# Altium PCB lcd_board_1.PcbDoc
Units mil, origin at the board's own origin, x right, y up, seen from the top; angles counter-clockwise.
Board outline 6000 x 4000 mil, 2 copper layers (Top Layer, Bottom Layer); 100 components, 86 nets, 397 pads, 6 vias.
Unrouted connection lines stored in the file: 231.
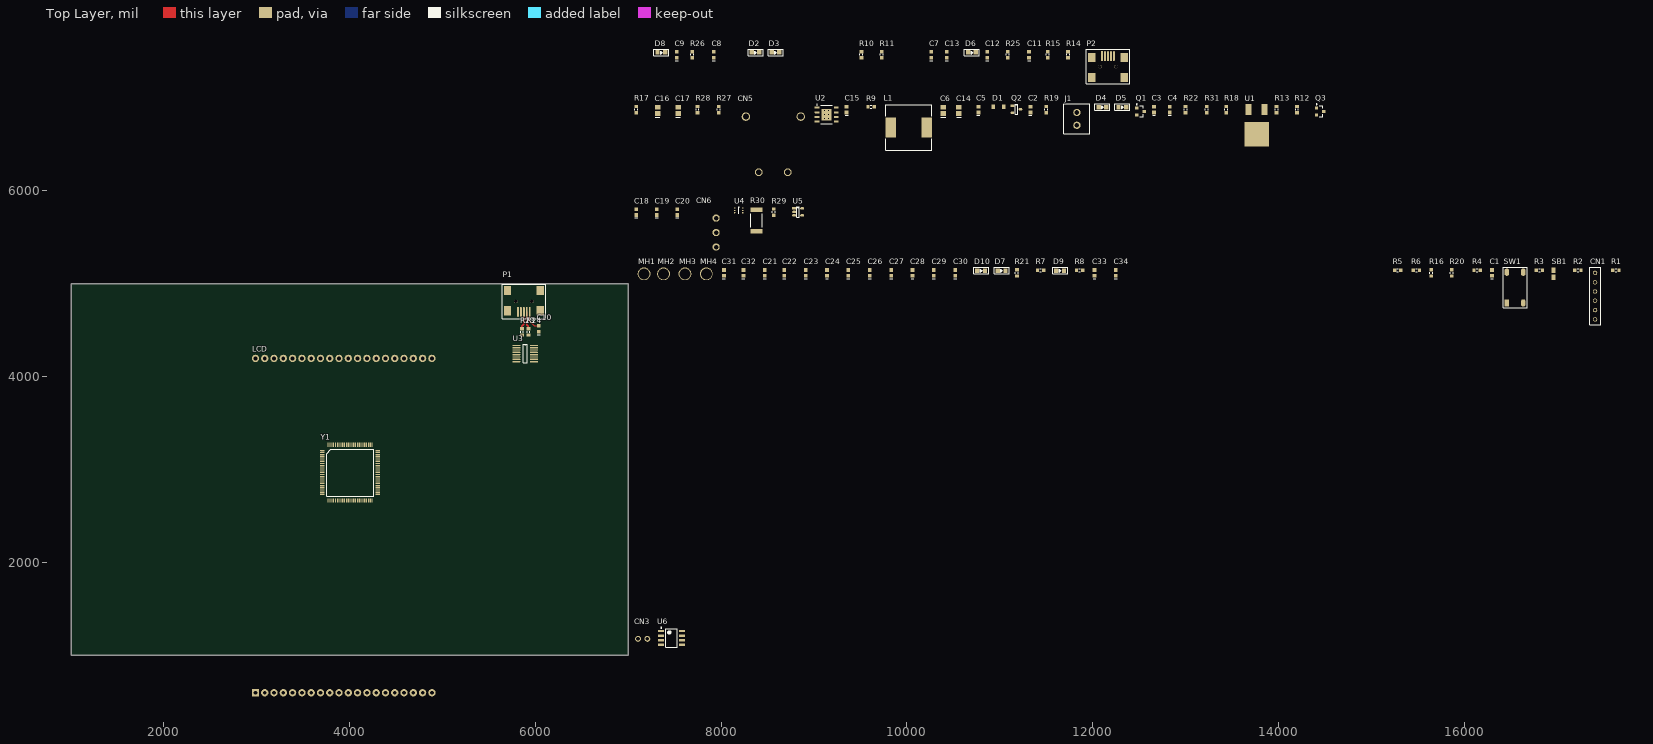
[diagram p0: Top Layer view]
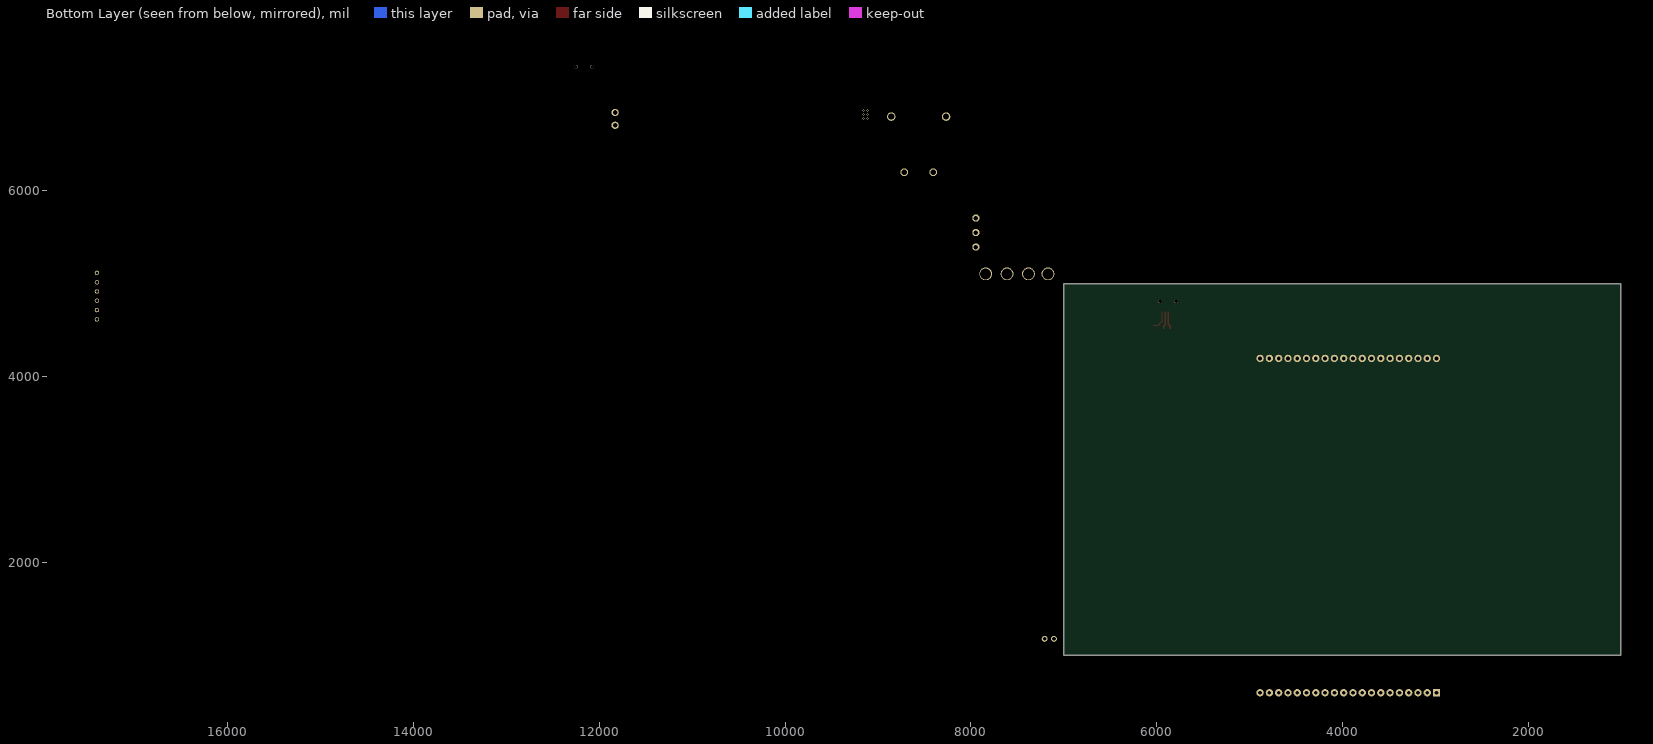
[diagram p1: Bottom Layer view, seen from below]

## Layer stack, top to bottom
Top Solder: solder mask 0.4, Solder Resist, Dk 3.5
Top Layer: signal copper 1.4
Dielectric 1: dielectric 12.6, FR-4, Dk 4.8
Bottom Layer: signal copper 1.4
Bottom Solder: solder mask 0.4, Solder Resist, Dk 3.5

## Board outline
1000,1000 7000,1000 7000,5000 1000,5000

## Design rules (kind name [scope] priority, off if disabled: settings)
Clearance [All] p1: gap=10 ignorepadtopadclearanceinfootprint=FALSE except(0: Arc-Hole Track-Hole SMDPad-Hole THPad-Hole Via-Hole Fill-Hole Poly-Hole Region-Hole Text-Hole)
DiffPairsRouting [All] p1: maxlimit=10 minlimit=10 mostfreqgap=10 toplayer_minwidth=15 toplayer_maxwidth=15 toplayer_prefwidth=15 bottomlayer_minwidth=15 bottomlayer_maxwidth=15 bottomlayer_prefwidth=15 maxuncoupledlength=500
PolygonConnect [All] p1: connectstyle=Relief reliefconductorwidth=10 reliefentries=4 polygonreliefangle="90 Angle" airgapwidth=10
RoomDefinition USB [InComponentClass('USB')] p1: confinementstyle=ConfineIn formatcopy=TRUE lockcomponents=FALSE outline 0,0 2000,0 2000,1000 0,1000
RoomDefinition LCD_board [InComponentClass('LCD_board')] p2: confinementstyle=ConfineIn formatcopy=TRUE lockcomponents=FALSE outline 7045,1060 9045,1060 9045,4860 7045,4860
RoomDefinition power [InComponentClass('power')] p3: confinementstyle=ConfineIn formatcopy=TRUE lockcomponents=FALSE outline 7045,5985 14520,5985 14520,7045 7045,7045
RoomDefinition "LED strip" [InComponentClass('LED strip')] p4: confinementstyle=ConfineIn formatcopy=TRUE lockcomponents=FALSE outline 7045,5315 8905,5315 8905,5940 7045,5940
RoomDefinition CAN [InComponentClass('CAN')] p5: confinementstyle=ConfineIn formatcopy=TRUE lockcomponents=FALSE outline 7045,1060 7635,1060 7635,1410 7045,1410
RoutingVias [All] p1: holewidth=28 width=50 viastyle="Through Hole" minholewidth=28 minwidth=50 maxholewidth=28 maxwidth=50
SolderMaskExpansion [All] p1: expansion=4
Width [All] p1: maxlimit=10 minlimit=10 preferedwidth=10
29 further rules are at their usual default settings.

## Classes and differential pairs
component class USB: C7 C8 C9 C10 C11 C12 C13 D2 D3 D6 D8 P1 P2 R10 R11 R14 R15 R23 R24 R25 R26 U3
component class power: C2 C3 C4 C5 C6 C14 C15 C16 C17 CN5 D1 D4 D5 J1 L1 Q1 Q2 Q3 R9 R12 R13 R17 R18 R19 R22 R27 R28 R31 U1 U2
component class "LED strip": C18 C19 C20 CN6 R29 R30 U4 U5
component class LCD_board: C1 C21 C22 C23 C24 C25 C26 C27 C28 C29 C30 C31 C32 C33 C34 CN1 CN2 D7 D9 D10 LCD LCD1 MH1 MH2 MH3 MH4 R1 R2 R3 R4 R5 R6 R7 R8 R16 R20 R21 SB1 SW1 Y1
component class CAN: CN3 U6
differential pair USB_Data: +USB_Data_P -USB_Data_N
differential pair USB_Data_UART: +USB_Data_UART_P -USB_Data_UART_N
differential pair Con_USB_Data: +Con_USB_Data_P -Con_USB_Data_N
differential pair Con_USB_Data_UART: +Con_USB_Data_UART_P -Con_USB_Data_UART_N

## Components (designator, comment, footprint, x,y, rotation, side; value= is the part's Value field where it differs from the comment)
C1 "0.1μF" "CAPC1608N(0603\")" 16299.57,5115.43 r90 top value=0.1µF
C2 "0.1μF" "CAPC1608N(0603\")" 11330,6875 r90 top value=0.1µF
C3 "0.1μF" "CAPC1608N(0603\")" 12660,6875 r90 top value=0.1µF
C4 "0.1μF" "CAPC1608N(0603\")" 12830,6875 r90 top value=0.1µF
C5 "10nF" "CAPC1608N(0603\")" 10770,6875 r90 top
C6 "22µF" "CAPC2012N(0805\")" 10390,6865 r90 top
C7 "0.1μF" "CAPC1608N(0603\")" 10260,7465 r90 top value=0.1µF
C8 "0.1μF" "CAPC1608N(0603\")" 7920,7465 r90 top value=0.1µF
C9 "0.1μF" "CAPC1608N(0603\")" 7520,7465 r90 top value=0.1µF
C10 "1μF" "CAPC1608N(0603\")" 6035,4513.46 r90 top value=1µF
C11 "0.1μF" "CAPC1608N(0603\")" 11315,7465 r90 top value=0.1µF
C12 "0.1μF" "CAPC1608N(0603\")" 10865,7465 r90 top value=0.1µF
C13 "1μF" "CAPC1608N(0603\")" 10430,7465 r90 top value=1µF
C14 "22µF" "CAPC2012N(0805\")" 10560,6865 r90 top
C15 "82pF" "CAPC1608N(0603\")" 9350,6875 r90 top
C16 "4.7µF" "CAPC2012N(0805\")" 7315,6865 r90 top
C17 "4.7µF" "CAPC2012N(0805\")" 7535,6865 r90 top
C18 "0.1μF" "CAPC1608N(0603\")" 7085,5770 r90 top value=0.1µF
C19 "0.1μF" "CAPC1608N(0603\")" 7305,5770 r90 top value=0.1µF
C20 "0.1μF" "CAPC1608N(0603\")" 7525,5770 r90 top value=0.1µF
C21 "0.1μF" "CAPC1608N(0603\")" 8469.57,5115.43 r90 top value=0.1µF
C22 "0.1μF" "CAPC1608N(0603\")" 8679.57,5115.43 r90 top value=0.1µF
C23 "0.1μF" "CAPC1608N(0603\")" 8909.57,5115.43 r90 top value=0.1µF
C24 "0.1μF" "CAPC1608N(0603\")" 9139.57,5115.43 r90 top value=0.1µF
C25 "0.1μF" "CAPC1608N(0603\")" 9369.57,5115.43 r90 top value=0.1µF
C26 "0.1μF" "CAPC1608N(0603\")" 9599.57,5115.43 r90 top value=0.1µF
C27 "0.1μF" "CAPC1608N(0603\")" 9829.57,5115.43 r90 top value=0.1µF
C28 "1μF" "CAPC1608N(0603\")" 10059.57,5115.43 r90 top value=1µF
C29 "1μF" "CAPC1608N(0603\")" 10289.57,5115.43 r90 top value=1µF
C30 "1μF" "CAPC1608N(0603\")" 10519.57,5115.43 r90 top value=1µF
C31 "2.2µF" "CAPC1608N(0603\")" 8029.57,5115.43 r90 top
C32 "2.2µF" "CAPC1608N(0603\")" 8239.57,5115.43 r90 top
C33 "0.1μF" "CAPC1608N(0603\")" 12019.57,5115.43 r90 top value=0.1µF
C34 "1μF" "CAPC1608N(0603\")" 12249.57,5115.43 r90 top value=1µF
CN1 "Header Male 1x6" "Header, Male, 1X6" 17409.57,4615.43 r90 top
CN3 "640456-2" 640456-2 7155,1190 r0 top
CN5 "Power" "2X1 Power Connector 90 degrees" 8405,6200 r0 top
CN6 "B3PS-VH(LF)(SN)" "3X1 Male Header, Locking, 10A" 7945,5550 r90 top
D1 "DSS14UTR" SOD-123F 10985,6905 r0 top
D2 "Red" LED0805 8370,7490 r0 top
D3 "Red" LED0805 8585,7490 r0 top
D4 "Red" LED0805 12105,6900 r0 top
D5 "Green" LED0805 12320,6900 r0 top
D6 "Blue" LED0805 10700,7490 r0 top
D7 "Orange" LED0805 11019.57,5140.43 r0 top
D8 "Green" LED0805 7355,7490 r0 top
D9 "Blue" LED0805 11649.57,5140.43 r0 top
D10 "Green" LED0805 10799.57,5140.43 r0 top
J1 "2x1 Term Block" "2X1 Terminal Blocks" 11830,6705 r90 top
L1 "15µH" WE-PD-XL 10020,6680 r0 top
LCD "3.5 Inch TFT Touchscreen LCD" LCD_touchscreen_tft 2985,595 r90 top
MH1 "3mm" Mount-Hole_3mm 7169.57,5105.43 r0 top
MH2 "3mm" Mount-Hole_3mm 7379.57,5105.43 r0 top
MH3 "3mm" Mount-Hole_3mm 7609.57,5105.43 r0 top
MH4 "3mm" Mount-Hole_3mm 7839.57,5105.43 r0 top
P1 "Mini B USB Port" "Mini B USB Footprint" 5875,4810 r180 top
P2 "Mini B USB Port" "Mini B USB Footprint" 12165,7335 r0 top
Q1 "DMP3098L-7" DIOD-SOT23-3_V 12515,6855 r0 top
Q2 "MOSFET N-Channel, 30V, 6.2A," SOT-23 11140,6915 r0 top
Q3 "DMP3098L-7" DIOD-SOT23-3_V 14450,6855 r0 top
R1 "100k" "RESC1608N(0603\")" 17634.57,5145.43 r0 top
R2 "10k" "RESC1608N(0603\")" 17224.57,5145.43 r0 top
R3 "10k" "RESC1608N(0603\")" 16809.57,5145.43 r0 top
R4 "10k" "RESC1608N(0603\")" 16139.57,5145.43 r0 top
R5 "10k" "RESC1608N(0603\")" 15284.57,5145.43 r0 top
R6 "10k" "RESC1608N(0603\")" 15484.57,5145.43 r0 top
R7 "715R" "RESC1608N(0603\")" 11439.57,5145.43 r0 top
R8 "715R" "RESC1608N(0603\")" 11859.57,5145.43 r0 top
R9 "100k" "RESC1608N(0603\")" 9615,6905 r0 top
R10 "100" "RESC1608N(0603\")" 9510,7465 r90 top
R11 "100" "RESC1608N(0603\")" 9730,7465 r90 top
R12 "10k" "RESC1608N(0603\")" 14200,6875 r90 top
R13 "10k" "RESC1608N(0603\")" 13980,6875 r90 top
R14 "22" "RESC1608N(0603\")" 11735,7465 r90 top
R15 "22" "RESC1608N(0603\")" 11515,7465 r90 top
R16 "10k" "RESC1608N(0603\")" 15644.57,5115.43 r90 top
R17 "31.6kR" "RESC1608N(0603\")" 7085,6875 r90 top
R18 "100k" "RESC1608N(0603\")" 13440,6875 r90 top
R19 "10k" "RESC1608N(0603\")" 11500,6875 r90 top
R20 "10k" "RESC1608N(0603\")" 15864.57,5115.43 r90 top
R21 "715R" "RESC1608N(0603\")" 11184.57,5115.43 r90 top
R22 "715R" "RESC1608N(0603\")" 13000,6875 r90 top
R23 "22" "RESC1608N(0603\")" 5855,4480 r270 top
R24 "22" "RESC1608N(0603\")" 5925,4480 r270 top
R25 "100" "RESC1608N(0603\")" 11085,7465 r90 top
R26 "150R" "RESC1608N(0603\")" 7690,7465 r90 top
R27 "10k" "RESC1608N(0603\")" 7975,6875 r90 top
R28 "100k" "RESC1608N(0603\")" 7745,6875 r90 top
R29 "10k" "RESC1608N(0603\")" 8565,5770 r90 top
R30 "0.02" "RESC6332N(2512\")" 8380,5680 r90 top
R31 "715R" "RESC1608N(0603\")" 13230,6875 r90 top
SB1 "Solder Bridge" "Solder Bridge" 16959.57,5145.43 r0 top
SW1 "SPST" 4-SPST-NO 16459.57,4800.43 r90 top
U1 "3.3V Lin Reg 30Vin" T0-252 13765,6610 r90 top
U2 "36V 5A Buck DC-DC RT8279GSP" 8-SOP-EP 9135,6820 r0 top
U3 "FT230X" SSOP16 5795,4335 r0 top
U4 "Level Shifter" SOT-363 8145,5815 r0 top
U5 "ZXCT1110W5-7, Current Sensor, High-Side, Analog" SOT23-5 8785,5810 r0 top
U6 "SN65HVD232DR" 8-SOIC 7465,1185 r0 top
Y1 "STM32F413VGT6" STM-LQFP100_M 3705,3200.91 r0 top

## Footprints (in the part's own frame and the unit in brackets; to place one, negate y for a bottom-side part, rotate by r counter-clockwise, add the part's x,y. Pads: shape width x height; smd on the part's side, far side on the other; paste and mask are expansions set on the pad)
"2X1 Power Connector 90 degrees" [mm]
  round 2.1 hole 1.5: 1(0,0) 2(7.92,0)
  round 2.3 hole 1.7: 3(-3.54,15.2) 4(11.46,15.2)
  body extent -5.96,-5.32 13.84,18.68, height 13.56
"2X1 Terminal Blocks" [mm] "ED2740-ND"
  round 2 hole 1.24: 1(0,0) 2(3.5,0)
  silkscreen extent -2.29,-3.56 5.84,3.56, body extent -2.22,-3.44 5.78,3.56, height 8.4
"3X1 Male Header, Locking, 10A" [mm]
  round 2 hole 1.25: 1(-3.96,0) 2(0,0) 3(3.96,0)
  Top Layer pour cut-out: 7.239,-3.429
4-SPST-NO [mm]
  rect 2x1.3 smd: 1(-0.2,0)
  oval 2x1.3 smd: 2(8.2,0) 3(-0.2,-4.5) 4(8.2,-4.5)
  silkscreen extent -1.52,-5.59 9.53,1.02, body extent -0.56,-5.29 8.44,0.71, height 5
8-SOIC [mm] "SOIC, 8-Leads, Body 5x4mm, Pitch 1.27mm, IPC Low Density"
  rrect15% 1.65x0.65 smd: 1(-2.825,1.905) 2(-2.825,0.635) 3(-2.825,-0.635) 4(-2.825,-1.905) 5(2.825,-1.905) 6(2.825,-0.635) 7(2.825,0.635) 8(2.825,1.905)
  silkscreen extent -2.95,-2.5 1.6,2.9, body extent -3,-2.45 3,2.45, height 1.63
8-SOP-EP [mm]
  rrect18% 1.25x0.55 smd: 1(-2.625,1.905) 2(-2.625,0.635) 3(-2.625,-0.635) 4(-2.625,-1.905) 5(2.625,-1.905) 6(2.625,-0.635) 7(2.625,0.635) 8(2.625,1.905)
  rrect4% 2.69x3.2 smd: 9(0,0)
  silkscreen extent -2.75,-2.5 1.6,2.85, body extent -2.98,-2.45 2.98,2.45, height 1.52
640456-2 [mm]
  round 1.6 hole 1: 1(-1.27,-0.381) 2(1.27,-0.381)
  body extent -2.54,-3.05 2.54,2.79, height 10.09
"CAPC1608N(0603\")" [mm] "Chip Capacitor, Body 1.6x0.8mm (0603\"), IPC Medium Density"
  rect 1x1 smd: 1(-0.8,0) 2(0.8,0)
  silkscreen extent -1.6,-0.4 -1.6,0.4, body extent -0.8,-0.4 0.8,0.4, height 0.9
"CAPC2012N(0805\")" [mm] "Chip Capacitor, Body 2.0x1.3mm (0805\"), IPC Medium Density"
  rect 1.3x1.5 smd: 1(-0.85,0) 2(0.85,0)
  silkscreen extent -1.8,-0.65 -1.8,0.65, body extent -1,-0.62 1,0.63, height 1
DIOD-SOT23-3_V [mm] "SOT23, 3-Leads, Body 3x1.4mm, Pitch 0.95mm"
  rect 0.9x0.8 smd: 1(-1,0.95) 2(-1,-0.95) 3(1,0)
  silkscreen extent -1.12,-1.5 0.7,2.02, body extent -1.25,-1.5 1.25,1.5, height 1.1
"Header, Male, 1X6" [mm]
  round 1.2 hole 0.9: 1(0,0) 2(2.54,0) 3(5.08,0) 4(7.62,0) 5(10.16,0) 6(12.7,0)
  silkscreen extent -1.5,-1.5 14.2,1.5, body extent -1.27,-1.24 14,1.25, height 8.54
LCD_touchscreen_tft [mm]
  rect 2x2 hole 1.02: 1(0,0)
  round 2 hole 1.02: 2(0,-2.54) 3(0,-5.08) 4(0,-7.62) 5(0,-10.16) 6(0,-12.7) 7(0,-15.24) 8(0,-17.78) 9(0,-20.32) 10(0,-22.86) 11(0,-25.4) 12(0,-27.94) 13(0,-30.48) 14(0,-33.02) 15(0,-35.56) 16(0,-38.1) 17(0,-40.64) 18(0,-43.18) 19(0,-45.72) 20(0,-48.26) 21(91.44,-48.26) 22(91.44,-45.72) 23(91.44,-43.18) 24(91.44,-40.64) 25(91.44,-38.1) 26(91.44,-35.56) 27(91.44,-33.02) 28(91.44,-30.48) 29(91.44,-27.94) 30(91.44,-25.4) 31(91.44,-22.86) 32(91.44,-20.32) 33(91.44,-17.78) 34(91.44,-15.24) 35(91.44,-12.7) 36(91.44,-10.16) 37(91.44,-7.62) 38(91.44,-5.08) 39(91.44,-2.54) 40(91.44,0)
LED0805 [mm]
  rect 1.2x1.2 smd: 1(1.05,0) 2(-1.05,0)
  silkscreen extent -2.05,-0.9 2.05,0.9
"Mini B USB Footprint" [mm]
  rect 0.5x2.75 smd: 1(-1.6,2.913)
  oval 0.5x2.75 smd: 2(-0.8,2.913) 3(0,2.913) 4(0.8,2.913) 5(1.6,2.913)
  rect 2x2.5 smd: ""(-4.45,-2.912) ""(-4.45,2.588) ""(4.45,-2.912) ""(4.45,2.588)
  round 0.9 hole 0.95 unplated: ""(-2.2,0.038) ""(2.2,0.038)
  silkscreen extent -5.95,-4.64 5.92,4.74, body extent -4.95,-5.87 4.95,3.37, height 3.93
Mount-Hole_3mm [mm]
  round 3.5 hole 3: 1(0,0)
"RESC1608N(0603\")" [mm] "Chip Resistor, Body 1.6x0.8mm (0603\"), IPC Medium Density"
  rect 0.9x1 smd: 1(-0.85,0) 2(0.85,0)
  silkscreen extent -0.2,-0.4 0.2,0.4, body extent -0.77,-0.42 0.78,0.43, height 0.44
"RESC6332N(2512\")" [mm] "Chip Resistor, Body 6.3x3.2mm (2512\"), IPC Medium Density"
  rect 1.3x3.4 smd: 1(-2.95,0) 2(2.95,0)
  silkscreen extent -1.9,-1.6 1.9,1.6, body extent -3.2,-1.6 3.2,1.6, height 0.6
SOD-123F [mm]
  rect 0.95x1.2 smd: A(-1.425,0) K(1.425,0)
  body extent -1.87,-0.85 1.88,0.85, height 1.2
"Solder Bridge" [mm]
  rect 1.1x1.524 smd: 1(0,0) 2(0,-2)
SOT23-5 [mm]
  rect 1.06x0.65 smd: 1(0,0)
  oval 1.06x0.65 smd: 2(0,-0.95) 3(0,-1.9) 4(2.2,-1.9) 5(2.2,0)
  silkscreen extent 0.76,-2.38 1.45,0.48, body extent -0.18,-2.44 2.32,0.56, height 1.05
SOT-23 [mm]
  rect 1x0.7 smd: 1(-0.1,0)
  oval 1x0.7 smd: 2(-0.1,-1.9) 3(2.1,-0.95)
  silkscreen extent 0.7,-2.38 1.3,0.48, body extent -0.25,-2.4 2.25,0.6, height 1.06
SOT-363 [mm]
  rect 0.45x0.3 smd: 1(0,0)
  oval 0.45x0.3 smd: 2(0,-0.65) 3(0,-1.3) 4(2.2,-1.3) 5(2.2,-0.65) 6(2.2,0)
  silkscreen extent 0.94,-1.63 1.26,0.33, body extent -0.07,-1.7 2.23,0.4, height 1
SSOP16 [mm]
  rect 2.2x0.345 smd: 1(0,0)
  oval 2.2x0.345 smd: 2(0,-0.635) 3(0,-1.27) 4(0,-1.905) 5(0,-2.54) 6(0,-3.175) 7(0,-3.81) 8(0,-4.445) 9(4.8,-4.445) 10(4.8,-3.81) 11(4.8,-3.175) 12(4.8,-2.54) 13(4.8,-1.905) 14(4.8,-1.27) 15(4.8,-0.635) 16(4.8,0)
  silkscreen extent 1.84,-4.76 2.97,0.32
STM-LQFP100_M [mm]
  oval 1.2x0.3 smd: 1(0,0)
  rect 1.2x0.3 smd: 2(0,-0.5) 3(0,-1) 4(0,-1.5) 5(0,-2) 6(0,-2.5) 7(0,-3) 8(0,-3.5) 9(0,-4) 10(0,-4.5) 11(0,-5) 12(0,-5.5) 13(0,-6) 14(0,-6.5) 15(0,-7) 16(0,-7.5) 17(0,-8) 18(0,-8.5) 19(0,-9) 20(0,-9.5) 21(0,-10) 22(0,-10.5) 23(0,-11) 24(0,-11.5) 25(0,-12) 51(15.2,-12) 52(15.2,-11.5) 53(15.2,-11) 54(15.2,-10.5) 55(15.2,-10) 56(15.2,-9.5) 57(15.2,-9) 58(15.2,-8.5) 59(15.2,-8) 60(15.2,-7.5) 61(15.2,-7) 62(15.2,-6.5) 63(15.2,-6) 64(15.2,-5.5) 65(15.2,-5) 66(15.2,-4.5) 67(15.2,-4) 68(15.2,-3.5) 69(15.2,-3) 70(15.2,-2.5) 71(15.2,-2) 72(15.2,-1.5) 73(15.2,-1) 74(15.2,-0.5) 75(15.2,0)
  rect 0.3x1.2 smd: 26(1.6,-13.6) 27(2.1,-13.6) 28(2.6,-13.6) 29(3.1,-13.6) 30(3.6,-13.6) 31(4.1,-13.6) 32(4.6,-13.6) 33(5.1,-13.6) 34(5.6,-13.6) 35(6.1,-13.6) 36(6.6,-13.6) 37(7.1,-13.6) 38(7.6,-13.6) 39(8.1,-13.6) 40(8.6,-13.6) 41(9.1,-13.6) 42(9.6,-13.6) 43(10.1,-13.6) 44(10.6,-13.6) 45(11.1,-13.6) 46(11.6,-13.6) 47(12.1,-13.6) 48(12.6,-13.6) 49(13.1,-13.6) 50(13.6,-13.6) 76(13.6,1.6) 77(13.1,1.6) 78(12.6,1.6) 79(12.1,1.6) 80(11.6,1.6) 81(11.1,1.6) 82(10.6,1.6) 83(10.1,1.6) 84(9.6,1.6) 85(9.1,1.6) 86(8.6,1.6) 87(8.1,1.6) 88(7.6,1.6) 89(7.1,1.6) 90(6.6,1.6) 91(6.1,1.6) 92(5.6,1.6) 93(5.1,1.6) 94(4.6,1.6) 95(4.1,1.6) 96(3.6,1.6) 97(3.1,1.6) 98(2.6,1.6) 99(2.1,1.6) 100(1.6,1.6)
  silkscreen extent 1.18,-12.41 14.01,0.42, body extent -0.4,-14 15.6,2, height 1.6
T0-252 [mm]
  rect 6.7x6.7 smd: 1(0,0)
  rect 3x1.6 smd: 2(6.7,-2.2) 3(6.7,2.2)
  body extent -2.7,-3.47 7.4,3.27, height 2.37
WE-PD-XL [mm] "SMD Inductor, 2-Leads, Body 12.0 x 12.0 mm"
  rect 2.9x5.4 smd: 1(-4.95,0) 2(4.95,0)
  silkscreen extent -6.25,-6.25 6.25,6.25, body extent -6,-6 6,6, height 7.99

## Part data
C1 C2 C3 C4 C7 C8 C9 C11 C12 C21 C22 C23 C24 C25 C26 C27 C33: library part "0.1uF 100V 0603 SMD, Ceramic", "Capacitor, Ceramic, 100V, +/- 10%, 0603 SMD, X7R", Supplier Part Number 1=445-6938-1-ND, Created By="Ashwin Sira", MFG=TDK, MFG#=CGA3E3X7S2A104K080AB, PackageDescription="Chip Capacitor", Published=16-04-26, Publisher=AUVic, Supplier 1=Digi-Key
C5: library part "10 nF, 50V 0603 SMD, Ceramic", "Capacitor, Ceramic, 50V, +/- 10%, 0603 SMD", Supplier Part Number 1=1276-1921-1-ND, Created By=Gabriel, MFG=Samsung, MFG#=GRM188R61A475KE15D, PackageDescription="Chip Capacitor", Published=16-06-23, Publisher=AUVic, Supplier 1=Digi-Key
C6 C14: library part "22uF 35V 0805 SMD, Ceramic", "Capacitor, Ceramic, 35V, +/- 20%, 0805 SMD, X5R", Supplier Part Number 1=445-14428-1-ND, PackageDescription="Chip Capacitor", Published=14-06-01, Publisher=AUVic, Supplier 1=Digi-Key
C10 C13 C28 C29 C30 C34: library part "1uF 25V 0603 SMD, Ceramic", "Capacitor, Ceramic, 25V, +/- 10%, 0603 SMD, X5R", Supplier Part Number 1=490-3897-1-ND, Created By="Andy Bates", MFG=Murata-Electronics-North-America, MFG#=GRM188R61E105KA12D, PackageDescription="Chip Capacitor", Published=16-06-27, Publisher=AUVic, Supplier 1=Digi-Key
C15: library part "82pF 50V 0603 SMD, Ceramic", "82pF 50V Ceramic Capacitor C0G, NP0 0603", Supplier Part Number 1=478-1174-1-ND, ComponentLink1Description=Digikey, ComponentLink1URL=https://www.digikey.ca/product-detail/en/avx-corporation/06035A820JAT2A/478-1174-1-ND/564206, Created By="Robert Keen", Created On=2018-07-18, Supplier 1=Digi-Key
C16 C17: library part "4.7uF 35V 0805 SMD, Ceramic", "Capacitor, Ceramic, 35V, +/- 10%, 0805 SMD, X5R", Supplier Part Number 1=1276-6722-1-ND, Made By="Andy Bates", PackageDescription="Chip Capacitor", Published=16-11-12, Publisher=AUVic, Supplier 1=Digi-Key
C18 C19 C20: library part "0.1uF 16V 0603 SMD, Ceramic", "Capacitor, Ceramic, 16V, +/- 10%, 0603 SMD, X7R", Supplier Part Number 1=1276-1005-1-ND, Created By="Andy Bates", PackageDescription="Chip Capacitor", Published=16-04-26, Publisher=AUVic, Supplier 1=Digi-Key
C31 C32: library part "2.2uF, 50V, 0603 SMD, X5R, Ceramic", "Capacitor, Ceramic, 50V, 10%, 0603 SMD, X5R", Supplier Part Number 1=490-10733-1-ND, PackageDescription="Chip Capacitor", Publisher=AUVic, Supplier 1=Digi-Key
CN1: library part "Header, Male, 1x6", "1x6, Pads Pitch: 0.1\" (2.54mm), Through hole", Supplier 1 Part Number=952-2270-ND, Made Bates="Andy Bates", Supplier 1=Digikey
CN3: library part "2x1 Male Header, Friction Lock", "CONN HEADER VERT 2POS .100 TIN", Supplier Part Number 1=A1921-ND, ComponentLink1Description=Digikey, ComponentLink1URL=https://www.digikey.ca/product-detail/en/te-connectivity-amp-connectors/640456-2/A1921-ND/109003, Made By="Robert Keen", Made on=2018-08-15, Supplier 1=Digi-Key
CN5: library part "2x1, Male header, Right Angle, Latch holder", "Connector Header Through Hole, Right Angle 2 position 0.312\" (7.92mm)", Supplier Part Number 1=H10706-ND, ComponentLink1Description="Digikey (male)", ComponentLink1URL=https://www.digikey.ca/product-detail/en/hirose-electric-co-ltd/DF22R-2P-7.92DS-05/H10706-ND/1025057, ComponentLink2Description="Digikey (female)", ComponentLink2URL=https://www.digikey.ca/product-detail/en/hirose-electric-co-ltd/DF22R-2S-7.92C-28/H1615-ND/510248, ComponentLink3Description="Digikey (crimp)", ComponentLink3URL=https://www.digikey.ca/product-detail/en/hirose-electric-co-ltd/DF22-1416SCF/H2788CT-ND/365031, Made By="Robert Keen", Made on=2018-08-16, Supplier 1=Digi-Key, Supplier 2=Digi-Key, Supplier 3=Digi-Key, Supplier Part Number 2=H1615-ND, Supplier Part Number 3=H2788CT-ND
CN6: library part "3x1 Male Header, Locking, 10A", "CONN HEADER VH SIDE 3POS 3.96MM", Supplier Part Number 1=455-1649-ND, ComponentLink1Description="Digikey (male)", ComponentLink1URL=https://www.digikey.ca/product-detail/en/jst-sales-america-inc/B3PS-VH-LF-SN/455-1649-ND/926556, ComponentLink2Description="Digikey (female)", ComponentLink2URL=https://www.digikey.ca/product-detail/en/jst-sales-america-inc/VHR-3N/455-1184-ND/608625, ComponentLink3Description="Digikey (crimps)", ComponentLink3URL=https://www.digikey.ca/product-detail/en/jst-sales-america-inc/SVH-21T-P1.1/455-1133-1-ND/527367, Made By="Robert Keen", Made on=2018-08-16, Supplier 1=Digi-Key, Supplier Part Number 2=455-1184-ND, Supplier Part Number 3=455-1133-1-ND
D1: "Diode, Schottky, 40V, 1A", Supplier Part Number 1=1655-1927-1-ND, ComponentLink1Description=Digikey, ComponentLink1URL=https://www.digikey.ca/product-detail/en/smc-diode-solutions/DSS14UTR/1655-1927-1-ND/8341869, Created By="Robert Keen", Date Created=2018-07-11, Publisher=AUVic, Supplier 1=Digi-Key
D2 D3 D4: library part "LED, 0805 (2012), Red, Clear", "LED, 0805 (2012), Red, Clear", Supplier Part Number 1=732-4984-1-ND, Colour=Red, Created By="Ashwin Sira", Supplier 1=Digi-Key
D5 D8 D10: library part "LED, 0805 (2012), Green, Clear", "LED, 0805 (2012), Green, Clear", Supplier Part Number 1=475-1410-1-ND, Colour=Green, Created By="Andy Bates", Supplier 1=Digi-Key
D6 D9: library part "LED, 0805 (2012), Blue, Clear", "LED, 0805 (2012), Blue, Clear", Colour=Red, Supplier Part Number 1=732-4982-1-ND, Created By="Ashwin Sira", Supplier 1=Digi-Key
D7: library part "LED, 0805 (2012), Orange, Clear", "LED, 0805 (2012), Orange, Clear", Supplier Part Number 1=160-1413-1-ND, Colour=Orange, ComponentLink1Description=Digikey, ComponentLink1URL=https://www.digikey.ca/product-detail/en/lite-on-inc/LTST-C170KFKT/160-1413-1-ND/386774, Created By="Robert Keen", Supplier 1=Digi-Key
J1: library part "2x1 Terminal Block", Supplier Part Number 1=ED2740-ND, Made By="Andy Bates", Supplier 1=Digikey
L1: library part "15µH 5A Inductor", "15µH Shielded Wirewound Inductor 5A 27 mOhm Max Nonstandard", Supplier Part Number 1=732-1225-1-ND, ComponentLink1Description=Digikey, ComponentLink1URL=https://www.digikey.ca/product-detail/en/wurth-electronics-inc/744770115/732-1225-1-ND/1639286, Created By="Robert Keen", Created On=2018-06-13, Supplier 1=Digi-Key
LCD: library part "Adafruit ILI9341", "3.2\" TFT LCD with Touchscreen Breakout Board w/MicroSD Socket", Supplier Part Number 1=1528-2614-ND, ComponentLink1Description=Adafruit, ComponentLink1URL=https://www.adafruit.com/product/1743, ComponentLink2Description=Datasheet, ComponentLink2URL=https://cdn-shop.adafruit.com/datasheets/ILI9341.pdf, ComponentLink3Description="Raw LCD Datasheet", ComponentLink3URL=https://cdn-shop.adafruit.com/datasheets/MI0283QT-11+V1.1.PDF, ComponentLink4Description=DigiKey, ComponentLink4URL=https://www.digikey.ca/products/en/optoelectronics/display-modules-lcd-oled-graphic/107?k=&pkeyword=&pv652=165&FV=ffe0006b%2Cfffc05f8&quantity=0&ColumnSort=0&page=1&pageSize=25, ComponentLink5Description="Adafruit Guide", ComponentLink5URL=https://cdn-learn.adafruit.com/downloads/pdf/adafruit-2-dot-8-color-tft-touchscreen-breakout-v2.pdf, Supplier 1=Digi-Key, Supplier 2=Digi-Key, Supplier Part Number 2=S7053-ND
MH1 MH2 MH3 MH4: library part Mount_Hole_3mm
P1 P2: "Mini B USB Port - Female", Supplier Part Number 1=151-1206-1-ND, Created By="Gabriel Green", Created On="July 5, 2017", Supplier 1=Digi-Key
Q1 Q3: library part CMP-0697-00001-2, "P-Channel Enhancement Mode MOSFET, -30 V VDS, -55 to 155 degC, 3-Pin SOT23, RoHS, Tape and Reel", Manufacturer="Diodes Inc", Operating Temperature Range="-55 to 150 degC", ComponentLink1Description="Manufacturer URL", ComponentLink1URL=http://www.diodes.com/, ComponentLink2Description=Datasheet, ComponentLink2URL=http://www.diodes.com/datasheets/ds31447.pdf, ComponentLink3Description="Package Specification", ComponentLink3URL=http://www.diodes.com/datasheets/ap02002.pdf, DatasheetVersion="Rev. 8 - 2", IDS (TA="25 degC)=-3.8 A", Mounting Technology="Surface Mount", PackageDescription="3-Pin Small Outline Transistor, Body 1.3 x 2.9 mm, Pitch 0.95 mm", PackageReference=SOT23, PackageVersion="Rev. 75", Packing="Tape and Reel", PartNumber=DMP3098L-7, PD (TA="25 degC)=1.08 W", RDS(on) (Max.) (VGS="4.5 V)=120 mOhm", RoHS=TRUE, VDS="-30 V", VGS="+/- 20 V", VGS(th) (Max.)="-2.1 V"
Q2: "N-Channel 30V 6.2A (Ta) 900mW (Ta) Surface Mount SOT-23", Supplier Part Number 1=DMN3023L-7DIDKR-ND, ComponentLink1Description=Digi-Key, ComponentLink1URL=https://www.digikey.ca/product-detail/en/diodes-incorporated/DMN3023L-7/DMN3023L-7DICT-ND/5453155, Created By="Poorna Chander Kalidas", Supplier 1=Digi-Key
R1 R9 R18 R28: library part "100kR, 1%, 1/10W, 0603 SMD", "100kR, 1%, 1/10W, 0603 SMD", Supplier Part Number 1=311-100KGRCT-ND, Created On=14-06-30, Last Edited=14-06-30, Made By="Andy Bates", Owned By=AUVic, Supplier 1=Digi-Key
R2 R3 R4 R5 R6 R12 R13 R16 R19 R20 R27 R29: library part "10kR, 1%, 1/10W, 0603 SMD", "10kR, 1%, 1/10W, 0603 SMD", Supplier Part Number 1=311-10.0KHRCT-ND, Created On=14-05-31, Last Edited=14-05-31, Made By="Ashwin Sira", Owned By=AUVic, Supplier 1=Digi-Key
R7 R8 R21 R22 R31: library part "715R, 1%, 1/10W, 0603, SMD", "715R, 1%, 1/10W, 0603, SMD", Supplier Part Number 1=541-715HCT-ND, Created By="Ashwin Sira", Date Created=2016-06-10, Publisher=AUVic, Supplier 1=Digi-Key
R10 R11 R25: library part "100R, 1%, 1/10W, 0603 SMD", "100R, 1%, 1/10W, 0603 SMD", Supplier Part Number 1=311-100HRCT-ND, Created On=16-09-10, Last Edited=16-09-10, Made By="Andy Bates", Owned By=AUVic, Supplier 1=Digi-Key
R14 R15 R23 R24: library part "22 Ohm, 1%, 1/10W , 0603, SMD", "22 Ohm, 1%, 1/10W , 0603, SMD", Supplier Part Number 1=RMCF0603FT22R0CT-ND, ComponentLink1Description=Digikey, ComponentLink1URL=https://www.digikey.ca/product-detail/en/stackpole-electronics-inc/RMCF0603FT22R0/RMCF0603FT22R0CT-ND/1942946, Created By="Robert Keen", Date Created=2018-07-17, Publisher=AUVic, Supplier 1=Digi-Key
R17: library part "31.6kR, 1%, 1/10W, 0603, SMD", "31.6kR, 1%, 1/10W, 0603, SMD", Supplier Part Number 1=RMCF0603FT31K6CT-ND, ComponentLink1Description=Digikey, ComponentLink1URL=https://www.digikey.ca/product-detail/en/stackpole-electronics-inc/RMCF0603FT31K6/RMCF0603FT31K6CT-ND/1943089, Created By="Robert Keen", Date Created=2018-07-18, Supplier 1=Digi-Key
R26: library part "150R, 1%, 1/10W, 0603, SMD", "RES SMD 150 OHM 1% 1/10W 0603", Supplier Part Number 1=P150HCT-ND, ComponentLink1Description=Digikey, ComponentLink1URL=https://www.digikey.ca/product-detail/en/panasonic-electronic-components/ERJ-3EKF1500V/P150HCT-ND/198177, Created By="Robert Keen", Date Created=2018-08-15, Publisher=AUVic, Supplier 1=Digi-Key
R30: library part "0R02, 1%, 2W, 2512 SMD", "0R02, 1%, 2W, 2512 SMD", Supplier Part Number 1=A109677CT-ND, ComponentLink1Description=Digikey, ComponentLink1URL=https://www.digikey.ca/product-detail/en/te-connectivity-passive-product/RLP73V3AR020FTDF/A109677CT-ND/4032443, Created By="Robert Keen", Created On=2018-08-16, Supplier 1=Digi-Key
SW1: library part "4 pin Tacitle Switch", Supplier 1 Part Number=CKN9084CT-ND, Button Type="Single Pole Single Throw", Made By="Andy Bates", Supplier 1=Digikey
U1: library part "3.3V TO-252 Linear Regulator", Supplier Part Number 1=LP2950ACDT-3.3RGOSCT-ND, Supplier 1=Digi-Key
U3: library part "FTDI - USB to UART", Supplier Part Number 1=768-1135-1-ND, Created By="Gabriel Green", Created On="July 5th, 2017", Supplier 1=Digi-Key
U4: library part "Bidirectional Level Shifter, 1.65V - 5.5V VCCA, 1.65V - 5.5V VCCB", "Voltage Level Translator Bidirectional 1 Circuit 1 Channel 420Mbps SC-88 (SOT-363)", Supplier Part Number 1=296-32317-1-ND, ComponentLink1Description=Digikey, ComponentLink1URL=https://www.digikey.ca/product-detail/en/nxp-usa-inc/NTB0101AGWH/568-14541-1-ND/9449849, Made By="Andy Bates", Made on=2018-08-16, Supplier 1=Digi-Key
U5: "Diodes Incorporated, ZXCT1110W5-7", Supplier Part Number 1=ZXCT1110W5-7DICT-ND, Created By="Jacob Lower", Created On=2016-03-16, Publisher=AUVic, Supplier 1=Digi-Key
U6: library part "CAN Half Duplex SN65HVD232DR", "IC CAN TRANSCEIVER 3.3V 8-SOIC", Supplier Part Number 1=296-26344-1-ND, ComponentLink1Description=Digikey, ComponentLink1URL=https://www.digikey.ca/product-detail/en/texas-instruments/SN65HVD232DR/296-26344-1-ND/2254978, Made By="Robert Keen", Made on=2018-08-14, Supplier 1=Digi-Key
Y1: "ARM Cortex-M4 32-bit MCU, 180 MHz, 320 KB Internal Rap, 81 I/O, 100-pin LQFP, -40 to 85 degC, Tray", Supplier Part Number 1=497-17009-ND, Core Size=32-bit, Supplier=Digikey, Supplier 1=Digi-Key
SB1: Created On=2016/09/08, Made By="Andy Bates"
U2: ComponentLink1Description=Digikey, ComponentLink1URL=https://www.digikey.ca/product-detail/en/richtek-usa-inc/RT8279GSP/1028-1423-1-ND/5880353, Made By="Robert Keen", Made on=2017-07-18, Supplier 1=Digi-Key, Supplier 2=Digi-Key, Supplier 3=Digi-Key, Supplier Part Number 3=1028-1423-1-ND

## Via types
v1: diameter 19.68, hole 7.87, Top Layer to Bottom Layer, 6 vias

## Nets (pads, with @x,y where several pads share a name; then routed paths per layer and width w, separated by ;. In a path a pad name is that pad's centre, name@x,y a point inside that pad or via, vN(x,y) a via of type N, cw(c..) or ccw(c..) an arc to the next point about the centre after c; other vN are vias at no path point)
3V3: C4.2 C7.2 C18.1 C21.2 C22.2 C23.2 C24.2 C25.2 C26.2 C27.2 C28.2 C29.2 C30.2 CN1.1 R1.2 R3.2 R4.2 R10.2 R11.2 R22.2 U1.3 U3.3 U3.11 U3.12 U4.1 U4.5 U6.3 Y1.11 Y1.19 Y1.28 Y1.50 Y1.75 Y1.100
5V: C2.2 C3.2 C33.2 C34.2 LCD.22 Q1.2 Q2.3 Q3.2 R31.2 U1.2
5V_Buck: C6.1 C14.1 C15.2 L1.2 Q2.2 R9.2 R12.1 R19.2 R27.2 R30.1 U5.4
5V_UART: C8.2 C9.2 C10.2 P1.1 Q3.3 R26.2 | length 218.9
  Top Layer w10: P1.1 5937.99,4593.62 5986.65,4544.96 C10.2
5V_USB: C11.2 C12.2 C13.2 P2.1 Q1.3 R13.2 R25.2
Backlight: LCD.28 Y1.23
BOOT0: R16.2 Y1.94
BOOT1: R20.2 Y1.37
C/D: LCD.24 Y1.35
CCS: LCD.19 Y1.96
CD: LCD.20 Y1.95
CLK: LCD.4 Y1.30
Con_USB_Data_N: P2.2 R15.1
Con_USB_Data_P: P2.3 R14.1
Con_USB_Data_UART_N: P1.2 R24.1 | length 189.5
  Top Layer w15: P1.2 5906.5,4557.18 5925,4538.68 R24.1
Con_USB_Data_UART_P: P1.3 R23.1 | length 192.2
  Top Layer w15: R23.1@5850,4513.46 5850,4538.68 5875,4563.68 P1.3
Config-1: R5.2
Config-2: R6.2
CS: LCD.7 LCD.23 Y1.36 Y1.80
D0: LCD.33 Y1.16
D1: LCD.34 Y1.17
D2: LCD.35 Y1.18
D3: LCD.36 Y1.33
D4: LCD.37 Y1.34
D5: LCD.38 Y1.63
D6: LCD.39 Y1.64
D7: LCD.40 Y1.65
D/C: LCD.8 Y1.7
GND: C1.1 C2.1 C3.1 C4.1 C6.2 C7.1 C8.1 C9.1 C10.1 C11.1 C12.1 C13.1 C14.2 C16.2 C17.2 C18.2 C19.2 C20.2 C21.1 C22.1 C23.1 C24.1 C25.1 C26.1 C27.1 C28.1 C29.1 C30.1 C31.1 C32.1 C33.1 C34.1 CN1.3 CN5.2 CN6.3 D1.A D4.1 D5.1 D6.1 D7.1 D8.1 D9.1 D10.1 J1.2 LCD.21 P1.5 P2.5 R2.1 R5.1 R6.1 R16.1 R17.1 R18.1 R20.1 R28.1 R29.1 SW1.3 SW1.4 U1.1 U2.6 U3.5 U3.13 U4.2 U5.2 U6.2 Y1.10 Y1.20 Y1.27 Y1.49 Y1.74 Y1.99
IM0: LCD.18 Y1.97
IM1: LCD.17 Y1.98
IM2: LCD.16 Y1.1
IM3: LCD.15 Y1.2
LED_Power: C19.1 C20.1 CN6.1 R30.2 U4.6 U5.5
MISO: LCD.5 Y1.90
MOSI: LCD.6 Y1.91
NetC1_2: C1.2 R1.1 SB1.1 SW1.1 SW1.2
NetC5_1: C5.1 D1.K L1.1 U2.8
NetC5_2: C5.2 U2.1
NetC15_1: C15.1 R9.1 R17.2 U2.4
NetCN3_1: CN3.1 U6.7
NetCN3_2: CN3.2 U6.6
NetCN6_2: CN6.2 U4.4
NetD2_2: D2.2 R10.1
NetD3_2: D3.2 R11.1
NetD4_2: D4.2 R22.1
NetD5_2: D5.2 R31.1
NetD6_2: D6.2 R25.1
NetD7_2: D7.2 R7.1
NetD8_2: D8.2 R26.1
NetD9_2: D9.2 R8.1
NetD10_2: D10.2 R21.1
NetP2_4: P2.4 Y1.69
NetQ1_1: Q1.1 R19.1
NetQ2_1: Q2.1 R27.1 R28.2
NetQ3_1: Q3.1 R12.2 R13.1 R18.2
NetR29_2: R29.2 U5.3 Y1.15
NetU3_1: U3.1 Y1.87
NetU3_2: U3.2 Y1.84
NetU3_4: U3.4 Y1.86
NetU3_6: U3.6 Y1.85
NetU4_3: U4.3 Y1.66
NetU6_1: U6.1 Y1.81
NetU6_4: U6.4 Y1.82
NRST: CN1.5 SB1.2 Y1.14
PD13: R7.2 Y1.60
PD14: R21.2 Y1.61
PD15: R8.2 Y1.62
RD: LCD.26 Y1.31
RX_LED: D2.1 U3.14
SWCLK: CN1.2 R2.2 Y1.76
SWDIO: CN1.4 R3.1 Y1.72
SWO: CN1.6 R4.1 Y1.89
TX_LED: D3.1 U3.7
USB_Data_N: R15.2 Y1.70
USB_Data_P: R14.2 Y1.71
USB_Data_UART_N: R24.2 U3.9
USB_Data_UART_P: R23.2 U3.8
Vbat: C16.1 C17.1 CN5.1 J1.1 U2.7
VCAP_1: C31.2 Y1.48
VCAP_2: C32.2 Y1.73
WR: LCD.25 Y1.32
X+: LCD.29 Y1.24
X-: LCD.31 Y1.26
Y+: LCD.30 Y1.25
Y-: LCD.32 Y1.29
pads on no net: CN5.3 CN5.4 LCD.1 LCD.2 LCD.3 LCD.9 LCD.10 LCD.11 LCD.12 LCD.13 LCD.14 LCD.27 MH1.1 MH2.1 MH3.1 MH4.1 P1. P1.4 P2. U2.2 U2.3 U2.5 U2.9 U3.10 U3.15 U3.16 U5.1 U6.5 U6.8 Y1.3 Y1.4 Y1.5 Y1.6 Y1.8 Y1.9 Y1.12 Y1.13 Y1.21 Y1.22 Y1.38 Y1.39 Y1.40 Y1.41 Y1.42 Y1.43 Y1.44 Y1.45 Y1.46 Y1.47 Y1.51 Y1.52 Y1.53 Y1.54 Y1.55 Y1.56 Y1.57 Y1.58 Y1.59 Y1.67 Y1.68 Y1.77 Y1.78 Y1.79 Y1.83 Y1.88 Y1.92 Y1.93
copper on no net:
  other v1: 9113.35,6776.69 9156.65,6776.69 9113.35,6820 9156.65,6820 9113.35,6863.31 9156.65,6863.31